# Altium PCB Alarm_Clock_PCB.PcbDoc
Units mm, origin at the board's own origin, x right, y up, seen from the top; angles counter-clockwise.
Board outline 152.4 x 101.6 mm, 2 copper layers (Top Layer, Bottom Layer); 50 components, 61 nets, 211 pads, 30 vias.
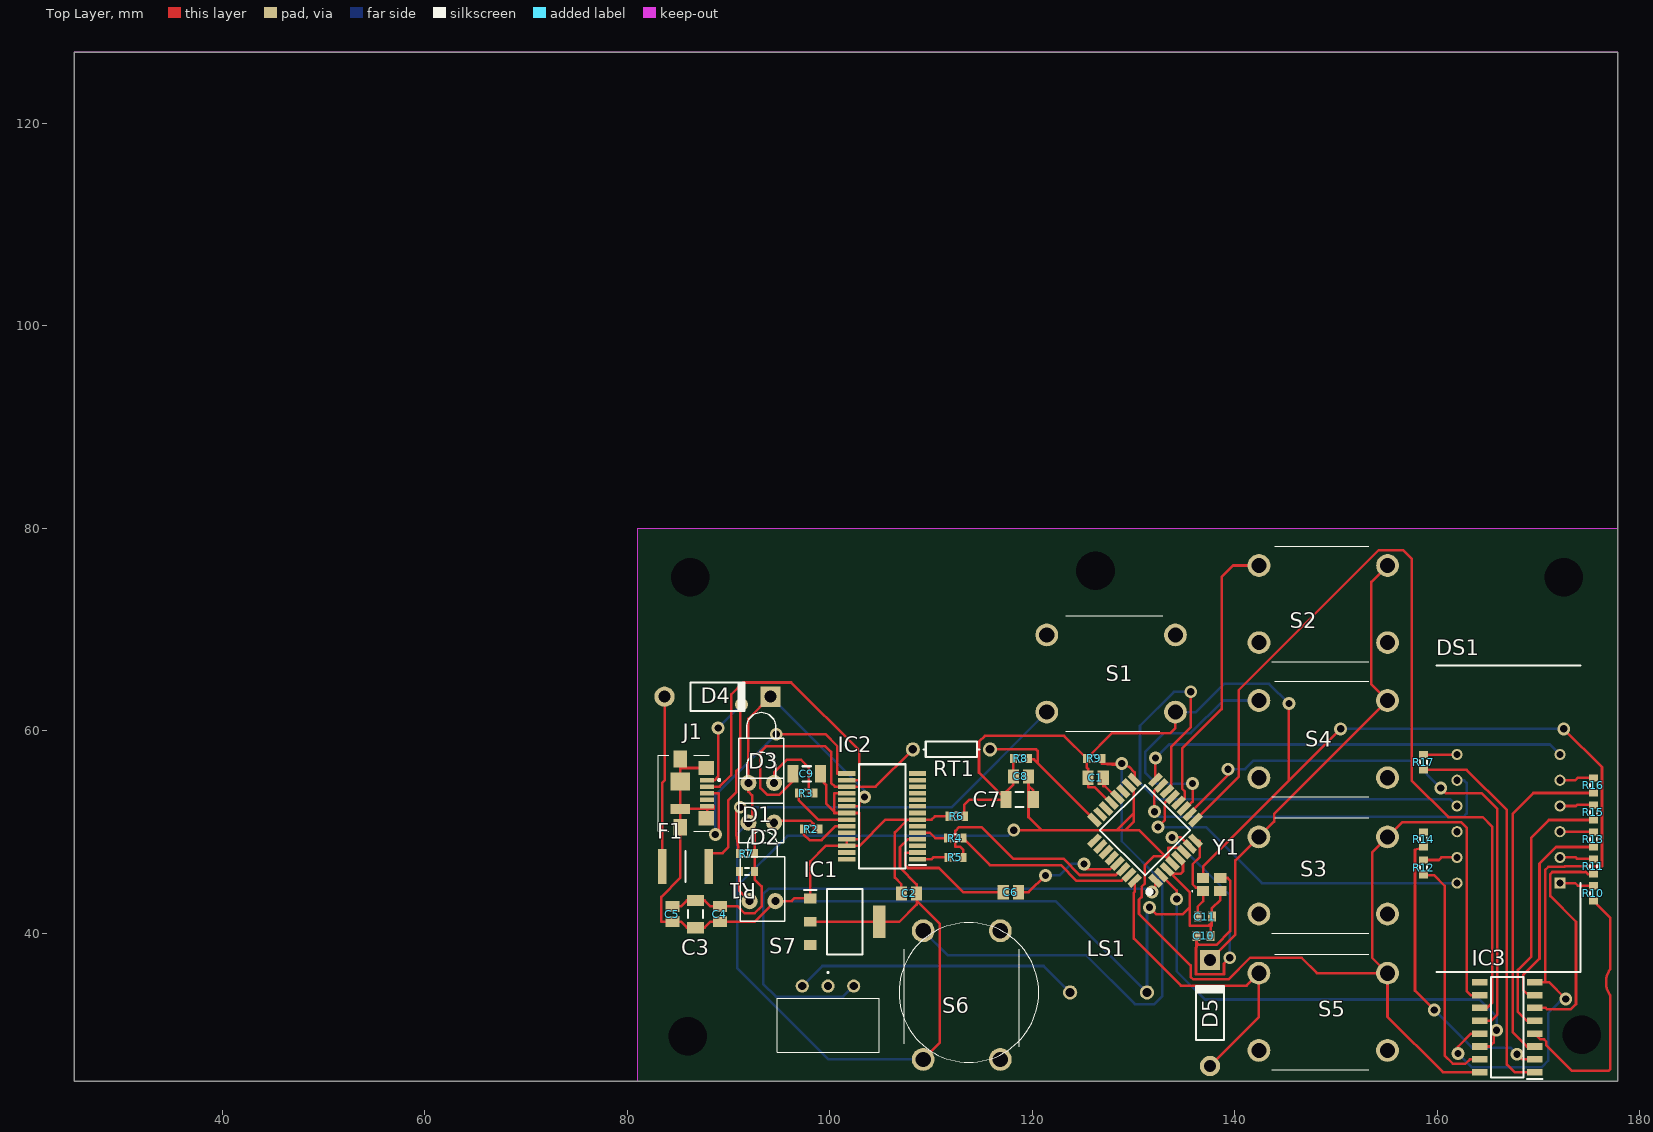
[diagram p0: Top Layer view]
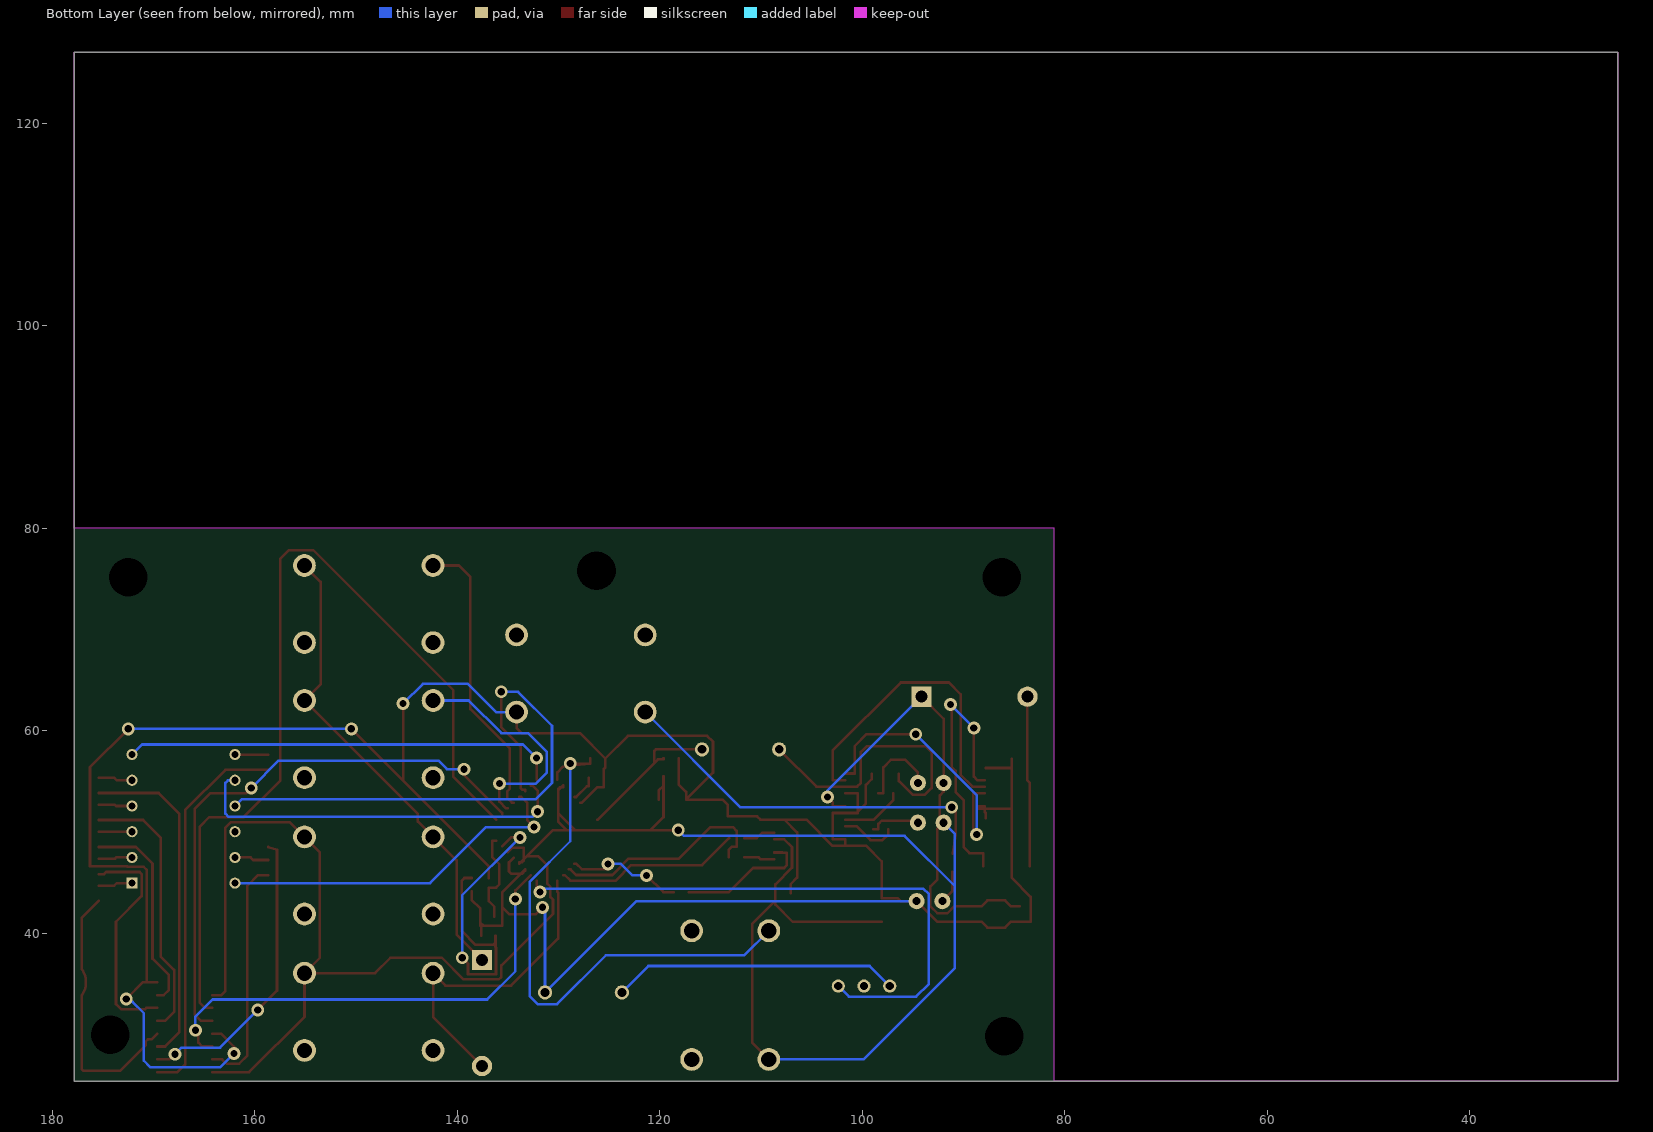
[diagram p1: Bottom Layer view, seen from below]

## Layer stack, top to bottom
Top Solder: solder mask 0.0102, Solder Resist, Dk 3.5
Top Layer: signal copper 0.0356
Dielectric 1: dielectric 0.32, FR-4, Dk 4.8
Bottom Layer: signal copper 0.0356
Bottom Solder: solder mask 0.0102, Solder Resist, Dk 3.5

## Board outline
25.4,25.4 177.8,25.4 177.8,127 25.4,127
cut-out: 25.4,127 25.4,93.726 25.4,42.164 25.4,25.4 81.059,25.4 81.059,80.01 177.8,80.01 177.8,115.189 177.8,127

## Design rules (kind name [scope] priority, off if disabled: settings)
Clearance [All] p1: gap=0.254 ignorepadtopadclearanceinfootprint=FALSE except(0: Arc-Hole Track-Hole SMDPad-Hole THPad-Hole Via-Hole Fill-Hole Poly-Hole Region-Hole Text-Hole)
PolygonConnect [All] p1: connectstyle=Relief reliefconductorwidth=0.254 reliefentries=4 polygonreliefangle="90 Angle" airgapwidth=0.254
RoomDefinition Alarm_Clock_Schematic [InComponentClass('Alarm_Clock_Schematic')] p1: confinementstyle=ConfineIn formatcopy=TRUE lockcomponents=FALSE outline 81.026,24.511 178.066,24.511 178.066,79.502 81.026,79.502
RoutingVias [All] p1: holewidth=0.711 width=1.27 viastyle="Through Hole" minholewidth=0.711 minwidth=1.27 maxholewidth=0.711 maxwidth=1.27
SolderMaskExpansion [All] p1: expansion=0.102 istentingtop=FALSE
Width [All] p1: maxlimit=0.254 minlimit=0.254 preferedwidth=0.254
30 further rules are at their usual default settings.

## Classes and differential pairs
component class Alarm_Clock_Schematic: C1 C2 C3 C4 C5 C6 C7 C8 C9 D1 D2 D3 D4 D5 DS1 F1 IC1 IC2 IC3 J1 LS1 R1 R2 R3 R4 R5 R6 R7 R8 R9 R10 R11 R12 R13 R14 R15 R16 R17 RT1 S2 S3 S4 S5 S6

## Components (designator, comment, footprint, x,y, rotation, side; value= is the part's Value field where it differs from the comment)
C1 "Cap" C0805 126.25,55.372 r0 top value=100nF
C2 "Cap" C0805 107.823,43.942 r0 top value=1uF
C3 "4.7uF _16V" C1206 86.741,41.91 r270 top
C4 "Cap" C0805 89.154,41.91 r90 top value=1uF
C5 "Cap" C0805 84.455,41.91 r90 top value=1uF
C6 "Cap" C0805 117.88,44.069 r180 top value=100nF
C7 "4.7uF _16V" C1206 118.745,53.213 r180 top
C8 "Cap" C0805 118.872,55.499 r0 top value=1uF
C9 "" C1206 97.722,55.753 r0 top value=100nF
C10 "22pF" CAPC1608X97N 136.906,39.751 r0 top
C11 "22pF" CAPC1608X97N 137.033,41.656 r0 top
D1 "PWR" LED-1 93.357,43.18 r90 top
D2 "RX" LED-1 93.23,50.927 r90 top
D3 "Tx" LED-1 93.23,54.864 r90 top
D4 "Diode 1N4001" DO-41 88.912,63.373 r0 top
D5 "Diode 1N4001" DO-41 137.541,32.131 r90 top
DS1 "E1-4036CUR1-CT" DIPS1016W51P254L3000H745Q12N 172.097,44.958 r180 top
F1 "MF-MSMF050-2" FUSC4632X85N 85.737,46.609 r0 top
IC1 "LM1117IMPX-5.0" SOT230P700X180-4N 101.473,41.148 r0 top
IC2 "FT232RL" SOP65P778X200-28N 105.168,51.562 r180 top
IC3 "74HC595D" SOIC127P600X175-16N 166.89,30.734 r180 top
J1 "0473461001" 0473461001 85.914,53.841 r270 top
LS1 "" 25415210ROX 123.728,34.163 r180 top
R1 "" J1-0603#1 91.833,46.101 r180 top value=1K
R2 "" J1-0603#1 98.171,50.292 r0 top value=1K
R3 "" J1-0603#1 97.675,53.848 r0 top value=1K
R4 "" J1-0603#1 112.395,49.403 r180 top value=1K
R5 "" J1-0603#1 112.407,47.498 r180 top value=1K
R6 "" J1-0603#1 112.534,51.562 r0 top value=1K
R7 "" J1-0603#1 91.821,47.879 r0 top value=10K
R8 "" J1-0603#1 118.872,57.277 r180 top value=10K
R9 "" J1-0603#1 126.123,57.277 r180 top value=10K
R10 "" J1-0603#1 175.399,43.954 r90 top value=220
R11 "" J1-0603#1 175.399,46.609 r90 top value=220
R12 "" J1-0603#1 158.635,46.494 r270 top value=220
R13 "" J1-0603#1 175.399,49.276 r90 top value=220
R14 "" J1-0603#2 158.635,49.276 r270 top value=220
R15 "" J1-0603#1 175.399,51.943 r90 top value=220
R16 "" J1-0603#1 175.399,54.61 r90 top value=220
R17 "" J1-0603#1 158.635,56.896 r270 top value=220
RT1 "ERT-J0EG103HA" AXIAL-0.3 112.014,58.166 r180 top
S1 "" 12411602 134.124,69.469 r180 top
S2 "H" 12411602 142.379,68.707 r0 top
S3 "T" 12411602 142.367,41.91 r0 top
S4 "M" 12411602 142.367,55.372 r0 top
S5 "A" 12411602 142.367,28.448 r0 top
S6 "TempSelect" 12411602 116.84,27.559 r90 top
S7 "09.10290.01" 091029001 99.822,34.798 r90 top
Y1 "ECS-160-8-36B2-CKM-TR" ECS160836B2CKMTR 137.707,44.816 r0 top
? "ATMEGA328P-AU" QFP80P900X900X120-32N 131.131,50.179 r135 top

## Footprints (in the part's own frame and the unit in brackets; to place one, negate y for a bottom-side part, rotate by r counter-clockwise, add the part's x,y. Pads: shape width x height; smd on the part's side, far side on the other; paste and mask are expansions set on the pad)
12411602 [mm]
  round 2.25 hole 1.5: 1(0,0) 2(12.7,0) 3(12.7,7.62) 4(0,7.62)
  silkscreen extent 1.25,-1.89 10.85,9.51, body extent -0.7,-1.9 13.3,9.5, height 4.65
25415210ROX [mm]
  round 1.417 hole 0.911: 1(0,0) 2(-7.59,0)
  silkscreen extent 3.1,-6.9 16.89,6.9, body extent -10.69,-6.9 3.1,6.9, height 8.61
091029001 [mm]
  round 1.3 hole 0.8: 1(0,0) 2(0,2.54) 3(0,-2.54)
  silkscreen extent -6.55,-5.08 1.4,5, body extent -8.6,-5 0.3,5, height 2.6
0473461001 [mm]
  rect 0.45x1.38 smd: 1(-1.3,1.975) 2(-0.65,1.975) 3(0,1.975) 4(0.65,1.975) 5(1.3,1.975)
  rect 1.425x1.55 smd: MP1(-2.487,1.89) MP2(2.487,1.89)
  rect 1.65x1.3 smd: MP3(-3.375,-0.685) MP6(3.375,-0.685)
  rect 1.8x1.9 smd: MP4(-1.15,-0.685)
  rect 1x1.9 smd: MP5(1.55,-0.685)
  silkscreen extent -3.75,-2.84 3.75,3.26, body extent -3.9,-2.5 3.9,2.5, height 2.72
AXIAL-0.3 [mm] "Axial Device, Thru-Hole; 2 Leads; 0.3 in Pin Spacing"
  round 1.4 hole 0.85: 1(-3.81,0) 2(3.81,0)
  silkscreen extent -2.77,-0.76 2.77,0.76
C0805 [mm] "Chip Capacitor, Body 2.0x1.3mm, IPC High Density"
  rect 1.1x1.4 smd: 1(-0.75,0) 2(0.75,0)
  body extent -1.1,-0.72 1.1,0.72, height 1.4
C1206 [mm] "Chip Capacitor, Body 3.2x1.6mm, IPC High Density"
  rect 1.1x1.7 smd: 1(-1.35,0) 2(1.35,0)
  silkscreen extent -0.4,-0.75 0.4,0.75, body extent -1.7,-0.9 1.7,0.9, height 1.3
CAPC1608X97N [mm]
  rect 0.78x0.98 smd: 1(-0.7,0) 2(0.7,0)
  body extent -0.8,-0.4 0.8,0.4, height 0.97
DIPS1016W51P254L3000H745Q12N [mm]
  rect 1.1x1.1 hole 0.7: 1(0,0)
  round 1.1 hole 0.7: 2(0,-2.54) 3(0,-5.08) 4(0,-7.62) 5(0,-10.16) 6(0,-12.7) 7(10.16,-12.7) 8(10.16,-10.16) 9(10.16,-7.62) 10(10.16,-5.08) 11(10.16,-2.54) 12(10.16,0)
  silkscreen extent -2.04,-21.47 12.21,8.77
DO-41 [mm] "Diode, Axial; Body 5.2 x 2.7 mm (LxDia. max), Lead Dia. 0.86 mm (max)"
  round 2 hole 1.2: 1(-5.23,0)
  rect 2x2 hole 1.2: 2(5.23,0)
  silkscreen extent -2.65,-1.4 2.75,1.4
ECS160836B2CKMTR [mm]
  rect 1.2x1 smd: 1(-0.85,-0.65) 2(0.85,-0.65) 3(0.85,0.65) 4(-0.85,0.65)
  silkscreen extent -1.95,-0.7 -1.85,-0.6, body extent -1.35,-1.05 1.35,1.05, height 0.7
FUSC4632X85N [mm]
  rect 0.85x3.43 smd: 1(-2.3,0) 2(2.3,0)
  silkscreen extent 0,-1.52 0,1.52, body extent -2.27,-1.62 2.27,1.62, height 0.85
J1-0603#1 [mm] "Chip Resistor, Body 1.6x0.8mm, IPC High Density"
  rect 0.7x0.9 smd: 1(-0.75,0) 2(0.75,0)
  silkscreen extent -0.2,-0.35 0.2,0.35, body extent -0.85,-0.48 0.85,0.48, height 0.9
J1-0603#2 [mm] "Chip Resistor, Body 1.6x0.8mm, IPC High Density"
  rect 0.7x0.9 smd: 2(0.75,0) 270(-0.75,0)
  silkscreen extent -0.2,-0.35 0.2,0.35, body extent -0.85,-0.48 0.85,0.48, height 0.9
LED-1 [mm] "LED; 2 Leads"
  round 1.6 hole 0.8: 1(0,1.27) 2(0,-1.27)
  silkscreen extent -2,-2.2 6.95,2.2
QFP80P900X900X120-32N [mm]
  rect 1.5x0.6 smd: 1(-4.25,2.8) 2(-4.25,2) 3(-4.25,1.2) 4(-4.25,0.4) 5(-4.25,-0.4) 6(-4.25,-1.2) 7(-4.25,-2) 8(-4.25,-2.8) 17(4.25,-2.8) 18(4.25,-2) 19(4.25,-1.2) 20(4.25,-0.4) 21(4.25,0.4) 22(4.25,1.2) 23(4.25,2) 24(4.25,2.8)
  rect 0.6x1.5 smd: 9(-2.8,-4.25) 10(-2,-4.25) 11(-1.2,-4.25) 12(-0.4,-4.25) 13(0.4,-4.25) 14(1.2,-4.25) 15(2,-4.25) 16(2.8,-4.25) 25(2.8,4.25) 26(2,4.25) 27(1.2,4.25) 28(0.4,4.25) 29(-0.4,4.25) 30(-1.2,4.25) 31(-2,4.25) 32(-2.8,4.25)
  silkscreen extent -4.8,-3.15 3.15,4.2, body extent -4.5,-4.5 4.5,4.5, height 1.2
SOIC127P600X175-16N [mm]
  rect 1.525x0.65 smd: 1(-2.712,4.445) 2(-2.712,3.175) 3(-2.712,1.905) 4(-2.712,0.635) 5(-2.712,-0.635) 6(-2.712,-1.905) 7(-2.712,-3.175) 8(-2.712,-4.445) 9(2.712,-4.445) 10(2.712,-3.175) 11(2.712,-1.905) 12(2.712,-0.635) 13(2.712,0.635) 14(2.712,1.905) 15(2.712,3.175) 16(2.712,4.445)
  silkscreen extent -3.48,-4.95 1.6,5.12, body extent -3.01,-4.94 3.01,4.96, height 1.75
SOP65P778X200-28N [mm]
  rect 1.7x0.45 smd: 1(-3.5,4.225) 2(-3.5,3.575) 3(-3.5,2.925) 4(-3.5,2.275) 5(-3.5,1.625) 6(-3.5,0.975) 7(-3.5,0.325) 8(-3.5,-0.325) 9(-3.5,-0.975) 10(-3.5,-1.625) 11(-3.5,-2.275) 12(-3.5,-2.925) 13(-3.5,-3.575) 14(-3.5,-4.225) 15(3.5,-4.225) 16(3.5,-3.575) 17(3.5,-2.925) 18(3.5,-2.275) 19(3.5,-1.625) 20(3.5,-0.975) 21(3.5,-0.325) 22(3.5,0.325) 23(3.5,0.975) 24(3.5,1.625) 25(3.5,2.275) 26(3.5,2.925) 27(3.5,3.575) 28(3.5,4.225)
  silkscreen extent -4.35,-5.14 2.3,5.14, body extent -3.89,-5.14 3.89,5.14, height 2
SOT230P700X180-4N [mm]
  rect 1.25x0.95 smd: 1(-3.4,2.3) 2(-3.4,0) 3(-3.4,-2.3)
  rect 1.25x3.2 smd: 4(3.4,0)
  silkscreen extent -4.02,-3.25 1.75,3.25, body extent -3.5,-3.25 3.5,3.25, height 1.8

## Part data
C1 C2 C4 C5 C6 C8: "Capacitor", LatestRevisionDate=17-Jul-2002, LatestRevisionNote="Re-released for DXP Platform.", PackageDescription="Radial Cap, Thru-Hole; 2 Leads; 0.3 in Pin Spacing", PackageReference=RAD-0.3, Published=8-Jun-2000, Publisher="Altium Limited"
C3 C7: library part "Cap Pol2", "Polarized Capacitor (Axial)", LatestRevisionDate=17-Jul-2002, LatestRevisionNote="Re-released for DXP Platform.", PackageDescription="Polarized Capacitor; 2 Leads", PackageReference=POLAR0.8, Published=8-Jun-2000, Publisher="Altium Limited"
C9: library part "Cap Semi", "Capacitor (Semiconductor SIM Model)", LatestRevisionDate=29-May-2009, LatestRevisionNote="IPC-7351 Footprint Added.", PackageDescription="Chip Capacitor", PackageReference=C1206, Published=8-Jun-2000, Publisher="Altium Limited"
C10 C11: library part VJ0603A220JXBAC, "Capacitor", Manufacturer_Name=Vishay, Mouser Part Number=77-VJ0603A220JXBAC, Datasheet Link=http://www.vishay.com/docs/45226/vj31xrohsautomlcc.pdf, Height=0.97mm, Manufacturer_Part_Number=VJ0603A220JXBAC, Mouser Price/Stock=https://www.mouser.co.uk/ProductDetail/Vishay-Vitramon/VJ0603A220JXBAC/?qs=cPJiB9SLnv4cPK1%252B20z21w%3D%3D
D1: library part LED1, "Typical Blue GaAs LED", LatestRevisionDate=08-Jul-2005, LatestRevisionNote="Mech Layer 1 removed.", PackageDescription="LED; 2 Leads", PackageReference=LED-1, Published=8-Jun-2000, Publisher="Altium Limited"
D2: library part LED1, "Typical RED GaAs LED", LatestRevisionDate=08-Jul-2005, LatestRevisionNote="Mech Layer 1 removed.", PackageDescription="LED; 2 Leads", PackageReference=LED-1, Published=8-Jun-2000, Publisher="Altium Limited"
D3: library part LED1, "Typical Green GaAs LED", LatestRevisionDate=08-Jul-2005, LatestRevisionNote="Mech Layer 1 removed.", PackageDescription="LED; 2 Leads", PackageReference=LED-1, Published=8-Jun-2000, Publisher="Altium Limited"
D4 D5: "1 Amp General Purpose Rectifier", Code_JEDEC=DO-204-AL, ComponentLink1Description="Manufacturer Link", ComponentLink1URL=http://www.fairchildsemi.com/, ComponentLink2Description=Datasheet, ComponentLink2URL=http://www.fairchildsemi.com/ds/1N%2F1N4001.pdf, DatasheetVersion=1998, LatestRevisionDate=17-Jul-2002, LatestRevisionNote="Re-released for DXP Platform.", PackageDescription="Diode, Axial; Body 5.2 x 2.7 mm (LxDia. max), Lead Dia. 0.86 mm (max)", PackageReference=DO-41, PackageVersion=Aug-1999, Published=8-Jun-2000, Publisher="Altium Limited"
DS1: "Display", Manufacturer_Name="STRONG BASED", Datasheet Link=https://cdn.ozdisan.com/ETicaret_Dosya/383272_1248365.pdf, Height=7.45mm, Manufacturer_Part_Number=E1-4036CUR1-CT
F1: "Fuse", Manufacturer_Name=Bourns, Mouser Part Number=652-MF-MSMF050-2, Arrow Part Number=MF-MSMF050-2, Arrow Price/Stock=https://www.arrow.com/en/products/mf-msmf050-2/bourns?region=nac, Datasheet Link=https://www.bourns.com/pdfs/mfmsmf.pdf, Height=0.85mm, Manufacturer_Part_Number=MF-MSMF050-2, Mouser Price/Stock=https://www.mouser.co.uk/ProductDetail/Bourns/MF-MSMF050-2?qs=t3shhpq1i1DZ7OBD5kLNoA%3D%3D
IC1: "Integrated Circuit", Manufacturer_Name="Texas Instruments", Mouser Part Number=926-LM1117IMPX-50, Datasheet Link=https://www.ti.com.cn/cn/lit/ds/symlink/lm1117.pdf?ts=1616831265067&ref_url=https%253A%252F%252Fwww.ti.com.cn%252Fproduct%252Fcn%252FLM1117, Height=1.8mm, Manufacturer_Part_Number=LM1117IMPX-5.0, Mouser Price/Stock=https://www.mouser.co.uk/ProductDetail/Texas-Instruments/LM1117IMPX-50?qs=X1J7HmVL2ZEsJC9W8GAV9A%3D%3D
IC2: "Integrated Circuit", Manufacturer_Name="FTDI Chip", Arrow Part Number=FT232RL, Arrow Price/Stock=https://www.arrow.com/en/products/ft232rl/ftdi-chip, Datasheet Link=http://www.ftdichip.com/Support/Documents/DataSheets/ICs/DS_FT232R.pdf, Height=2mm, Manufacturer_Part_Number=FT232RL
IC3: "Integrated Circuit", Manufacturer_Name=Toshiba, Mouser Part Number=N/A, Arrow Part Number=74HC595D, Arrow Price/Stock=https://www.arrow.com/en/products/74hc595d/toshiba?region=nac, Datasheet Link=https://toshiba.semicon-storage.com/info/docget.jsp?did=36768&prodName=74HC595D, Height=1.75mm, Manufacturer_Part_Number=74HC595D, Mouser Price/Stock=https://www.mouser.co.uk/ProductDetail/Toshiba/74HC595D?qs=7EBvPakHacViJoQmXKcnew%3D%3D
J1: "Connector", Manufacturer_Name=Molex, Mouser Part Number=N/A, Arrow Part Number=0473461001, Arrow Price/Stock=https://www.arrow.com/en/products/0473461001/molex?region=nac, Datasheet Link=https://componentsearchengine.com/Datasheets/1/0473461001.pdf, Height=2.45mm, Manufacturer_Part_Number=0473461001, Mouser Price/Stock=https://www.mouser.com/Search/Refine.aspx?Keyword=N%2FA
LS1: library part 254-15210-ROX, "Loudspeaker or Buzzer", Manufacturer_Name=Kobitone, Datasheet Link=https://www.mouser.de/datasheet/2/209/KT-400269-1172018.pdf, Height=8.51mm, Manufacturer_Part_Number=254-15210-ROX, Mouser Part Number=254-15210-ROX, Mouser Price/Stock=https://www.mouser.co.uk/ProductDetail/Kobitone/254-15210-ROX?qs=05UEgX2TgG1gFl%2FaATOCEw%3D%3D
R1 R2 R3 R4 R5 R6 R7 R8 R9 R10 R11 R12 R13 R14 R15 R16 R17: library part Res3, "Resistor", LatestRevisionDate=29-May-2009, LatestRevisionNote="IPC-7351 Footprint Added.", PackageDescription="Chip Resistor", PackageReference=J1-0603, Published=8-Jun-2000, Publisher="Altium Limited"
RT1: "Thermistor", Manufacturer_Name=Panasonic, Mouser Part Number=667-ERT-J0EG103HA, Arrow Part Number=ERT-J0EG103HA, Arrow Price/Stock=https://www.arrow.com/en/products/ert-j0eg103ha/panasonic, Datasheet Link=https://datasheet.datasheetarchive.com/originals/distributors/Datasheets-DGA6/548517.pdf, Height=0.55mm, Manufacturer_Part_Number=ERT-J0EG103HA, Mouser Price/Stock=https://www.mouser.com/Search/Refine.aspx?Keyword=667-ERT-J0EG103HA
S1 S2 S3 S4 S5 S6: library part 1241.1602, "Switch", Manufacturer_Name=SCHURTER, Mouser Part Number=693-1241.1602, Datasheet Link=https://www.schurter.com/en/datasheet/PMS, Height=4.55mm, Manufacturer_Part_Number=1241.1602, Mouser Price/Stock=https://www.mouser.co.uk/ProductDetail/Schurter/12411602?qs=JHn%2F0Af%2Fl5EgRnV0HUH1SQ%3D%3D
S7: "Switch", Manufacturer_Name=EOZ, Datasheet Link=http://uk.rs-online.com/web/p/products/2047871, Height=2.5mm, Manufacturer_Part_Number=09.10290.01
Y1: "Crystal or Oscillator", Manufacturer_Name=ECS, Mouser Part Number=520-160-8-36B2-CKMTR, Datasheet Link=https://www.mouser.fr/datasheet/2/122/ECX_2236B2-2400583.pdf, Height=0.6mm, Manufacturer_Part_Number=ECS-160-8-36B2-CKM-TR, Mouser Price/Stock=https://www.mouser.co.uk/ProductDetail/ECS/ECS-160-8-36B2-CKM-TR?qs=QNEnbhJQKvaIQPndV3OLHg%3D%3D
?: "Integrated Circuit", Manufacturer_Name=Microchip, Mouser Part Number=556-ATMEGA328P-AU, Arrow Part Number=ATMEGA328P-AU, Arrow Price/Stock=https://www.arrow.com/en/products/atmega328p-au/microchip-technology?region=nac, Datasheet Link=https://componentsearchengine.com/Datasheets/2/ATMEGA328P-AU.pdf, Height=1.2mm, Manufacturer_Part_Number=ATMEGA328P-AU, Mouser Price/Stock=https://www.mouser.co.uk/ProductDetail/Microchip-Technology-Atmel/ATMEGA328P-AU?qs=K8BHR703ZXiCmmgp6%2FGNmQ%3D%3D

## Free pads (board coordinates)
  round 1.524 hole 3.81: Mount1(85.979,29.845) Mount1(86.233,75.184) Mount1(126.238,75.819) Mount1(172.466,75.184) Mount1(174.244,29.972)

## Via types
v1: diameter 1.27, hole 0.711, Top Layer to Bottom Layer, 30 vias

## Nets (pads, with @x,y where several pads share a name; then routed paths per layer and width w, separated by ;. In a path a pad name is that pad's centre, name@x,y a point inside that pad or via, vN(x,y) a via of type N, cw(c..) or ccw(c..) an arc to the next point about the centre after c; other vN are vias at no path point)
3v3: C9.1 IC2.17 RT1.2 | length 28.6
  Top Layer w0.254: C9.1 96.372,55.042 95,53.67 93.828,53.67 93.142,54.356 93.142,57.912 93.701,58.471 99.568,58.471 100.127,57.912 100.127,54.864 100.504,54.487 IC2.17 104.525,54.487 RT1.2
A0: ?.23
A1: ?.24 R8.1 RT1.1 | length 15
  Top Layer w0.254: RT1.1 120.374,58.166 120.523,58.017 120.523,56.828 ; R8.1 119.622,57.175 120.175,57.175 120.523,56.828 ; ?.24 120.523,56.828
A2: ?.25
A3: ?.26
"A4 (SDA)": ?.27
"A5 (SCL)": ?.28
A6: ?.19
A7: ?.22
D0/RX: ?.30 R5.1 | length 22.1
  Top Layer w0.254: R5.1 113.157,48.26 112.852,48.565 112.395,48.565 112.395,50.114 112.776,50.495 114.986,50.495 118.11,47.371 123.063,47.371 124.667,45.767 128.249,45.767 128.806,46.325 ?.30
D1/TX: ?.31 R4.1 | length 18.4
  Top Layer w0.254: R4.1 115.812,46.736 122.809,46.736 124.333,45.212 128.488,45.212 128.499,45.202 128.814,45.202 129.372,45.76 ?.31
D2: ?.32 D5.1 S5.4 | length 31.7
  Top Layer w0.254: ?.32 130.106,44.094 130.023,44.011 130.023,39.49 134.663,34.849 141.148,34.849 S5.4 142.367,31.727 D5.1
D3: ?.1 S7.3 | length 58.7
  Top Layer w0.254: v1(131.801,44.094) 132.157,44.45 ?.1
  Bottom Layer w0.254: S7.3 101.321,33.757 94.666,33.757 93.421,35.001 93.421,43.866 93.98,44.425 131.47,44.425 v1(131.801,44.094)
D4: ?.2 IC3.14 | length 47.8
  Top Layer w0.254: ?.2 134.252,44.23 v1(134.252,43.396) ; IC3.14 165.176,28.829 165.557,29.21 165.557,30.15 v1(165.837,30.429)
  Bottom Layer w0.254: v1(134.252,43.396) 134.252,36.258 137.038,33.472 164.14,33.472 165.837,31.775 v1(165.837,30.429)
D5: ?.9 IC3.11 | length 88.3
  Top Layer w0.254: ?.9 140.36,55.448 140.36,64.008 154.203,77.851 156.591,77.851 157.48,76.962 157.48,55.067 161.07,51.477 164.474,51.477 165.405,50.546 165.405,33.147 164.897,32.639 IC3.11
D6: ?.10 IC3.12 | length 57.2
  Top Layer w0.254: ?.10 135.551,51.883 139.319,55.651 v1(139.319,56.21) ; v1(160.325,54.356) 160.833,53.848 164.363,53.848 165.913,52.299 165.913,31.979 165.303,31.369 IC3.12
  Bottom Layer w0.254: v1(139.319,56.21) 140.995,56.21 141.834,57.048 157.632,57.048 v1(160.325,54.356)
D7: ?.11 S4.4 | length 23.4
  Top Layer w0.254: ?.11 135.153,52.336 135.825,53.008 v1(135.825,54.788)
  Bottom Layer w0.254: v1(135.825,54.788) 132.232,54.788 131.14,55.88 131.14,57.912 132.994,59.766 135.636,59.766 138.862,62.992 S4.4
D8: ?.12 S2.4 | length 28.5
  Top Layer w0.254: ?.12 134.588,52.901 135.064,53.378 135.064,54.013 134.798,54.28 134.798,58.268 138.684,62.154 138.684,75.184 139.827,76.327 S2.4
D9: ?.13 DS1.12 | length 35.5
  Top Layer w0.254: v1(132.41,50.495) 133.071,51.156 133.071,52.852 133.685,53.467 ?.13
  Bottom Layer w0.254: v1(132.41,50.495) 137.135,50.495 142.672,44.958 DS1.12
D10: ?.14 DS1.9 | length 55.2
  Top Layer w0.254: ?.14 133.288,54.178 133.553,54.178 133.731,54.356 133.731,58.445 135.636,60.35 v1(135.636,63.856)
  Bottom Layer w0.254: v1(135.636,63.856) 133.985,63.856 130.632,60.503 130.632,54.864 132.232,53.264 161.251,53.264 DS1.9
D11: ?.15 DS1.8 | length 38.2
  Top Layer w0.254: v1(132.055,52.019) 132.055,54.099 132.554,54.598 ?.15
  Bottom Layer w0.254: v1(132.055,52.019) 132.563,51.511 162.585,51.511 162.89,51.816 162.89,54.864 162.636,55.118 DS1.8
D12: ?.16 DS1.6 | length 43
  Top Layer w0.254: ?.16 v1(132.157,57.302)
  Bottom Layer w0.254: v1(132.157,57.302) 133.503,58.649 171.106,58.649 DS1.6
D13: ?.17 R9.1 S6.3 | length 58.2
  Top Layer w0.254: R9.1 126.873,56.769 ; v1(128.829,56.769) 126.873,56.769 ; ?.17 130.106,55.898 129.54,56.464 128.804,56.548 126.873,56.769
  Bottom Layer w0.254: S6.3 111.658,37.821 125.324,37.821 130.124,33.02 132.055,33.02 132.817,33.782 132.817,45.11 128.829,49.098 v1(128.829,56.769)
GND: ?.3 ?.5 ?.21 C1.1 C2.1 C3.2 C4.1 C5.1 C7.2 C8.1 C9.2 C10.2 C11.2 D1.2 IC1.1 IC2.7 IC2.18 IC2.21 IC2.25 IC2.26 IC3.8 IC3.13 J1.5 J1.MP1 J1.MP2 J1.MP3 J1.MP4 J1.MP5 J1.MP6 LS1.2 R6.1 R6.2 R8.2 R9.2 S1.4 Y1.2 Y1.4 | length 320
  Top Layer w0.254: J1.MP3 85.229,56.328 ; J1.MP2 87.804,51.892 87.889,51.977 87.889,52.291 ; J1.MP1 85.229,56.328 ; IC1.1 IC1.1@98.069,43.448 ; C9.2 99.072,55.22 99.644,54.647 99.644,52.827 100.432,52.039 ; IC2.18 100.432,53.837 100.432,52.039 ; C2.1 107.073,44.85 106.421,45.502 106.421,49.962 107.696,51.237 ; R8.2 C8.1 118.122,54.702 117.395,53.975 C7.2 ; ?.21 127.675,52.901 126.144,54.432 125.5,54.432 C1.1 125.5,56.236 125.373,56.363 R9.2 ; v1(131.572,42.57) 132.258,41.885 134.823,41.885 135.56,42.621 ; S1.4 134.124,60.261 133.604,59.741 127.837,59.741 R9.2 ; ?.5 134.874,47.002 134.874,46.126 134.62,45.872 ?.3@133.741,45.872 ; Y1.4 136.857,46.609 145.339,55.091 ; C10.2 137.606,40.64 137.733,40.767 137.733,41.086 ; Y1.2 138.557,43.318 137.733,42.494 C11.2 137.733,41.086 ; v1(145.339,62.687) 145.339,55.091 ; v1(150.446,60.198) 145.339,55.091 ; v1(162.027,28.143) 162.027,28.804 163.322,30.099 IC3.13 ; IC3.8 170.637,35.179 ; v1(172.466,60.198) 176.251,56.413 176.251,46.609 172.593,46.609 172.551,46.567 170.942,46.567 170.637,46.262 170.637,35.179 ; v1(172.669,33.528) 171.018,35.179 170.637,35.179 ; J1.MP5 87.889,52.291 ; J1.MP5 J1.MP6 85.229,45.478 83.363,43.612 83.363,41.16 C5.1 85.293,41.16 85.893,40.56 C3.2 87.63,40.56 88.23,41.16 C4.1 92.607,41.16 D1.2 96.215,43.18 96.483,43.448 IC1.1@98.069,43.448 ; J1.MP5 J1.MP4 85.229,56.328 ; 87.889,52.291 J1.5 88.541,52.541 88.541,52.291 87.889,52.291 ; IC1.1@98.069,43.448 98.069,47.113 99.593,48.637 IC2.26 ; 100.432,52.039 100.584,51.887 ; 100.432,52.039 100.432,51.887 100.584,51.887 ; 100.584,51.887 IC2.21 102.921,51.887 102.921,49.287 IC2.25 IC2.26 ; IC2.26 102.921,48.637 105.521,51.237 107.696,51.237 ; 107.696,51.237 IC2.7 110.058,51.237 110.383,51.562 R6.1 R6.2 113.284,52.705 113.792,53.213 C7.2 ; C7.2 114.732,55.876 114.732,58.928 115.316,59.512 123.138,59.512 R9.2 ; ?.3@133.741,45.872 133.604,45.872 133.288,46.188 ?.3 ?.3@133.741,45.872 ; ?.3@133.741,45.872 135.56,44.053 135.56,42.621 ; 135.56,42.621 135.56,40.767 137.414,40.767 137.733,41.086
  Bottom Layer w0.254: D1.2 122.301,43.18 LS1.2 131.318,42.316 v1(131.572,42.57) ; S1.4 136.144,61.849 138.938,64.643 143.383,64.643 v1(145.339,62.687) ; v1(150.446,60.198) v1(172.466,60.198) ; v1(162.027,28.143) 163.373,26.797 170.307,26.797 170.942,27.432 170.942,32.131 172.04,33.229 172.095,33.229 172.394,33.528 v1(172.669,33.528)
Net_7: ?.7 C10.1 Y1.3 | length 34.9
  Top Layer w0.254: v1(133.782,49.479) 134.66,49.479 ?.7 ; C10.1 136.206,39.116 ; Y1.3 139.284,45.466 139.538,45.212 139.538,40.224 138.176,38.862 136.46,38.862 136.206,39.116 ; v1(139.497,37.592) 138.922,37.017 138.922,35.98 136.16,35.98 136.16,38.608 136.206,38.654 136.206,39.116
  Bottom Layer w0.254: v1(133.782,49.479) 139.497,43.764 v1(139.497,37.592)
Net_8: ?.8 C11.1 Y1.1 | length 9.3
  Top Layer w0.254: ?.8 136.55,49.154 136.55,47.549 135.839,46.838 135.839,44.831 136.144,44.526 136.857,44.526 Y1.1 136.857,43.171 136.333,42.647 C11.1
Net_20: ?.20 C1.2 | length 2.7
  Top Layer w0.254: C1.2 127,54.508 127.199,54.508 128.241,53.467 ?.20
NetC6_2: C6.2 IC2.2 | length 13.3
  Top Layer w0.254: IC2.2 107.874,47.987 107.83,47.943 107.437,47.943 107.437,46.736 107.716,46.457 110.769,46.457 113.157,44.069 C6.2
NetD1_1: D1.1 R1.2 | length 3.3
  Top Layer w0.254: R1.2 91.083,44.184 D1.1
NetD2_2: D2.2 R2.2 | length 5.1
  Top Layer w0.254: D2.2 94.703,51.13 98.069,51.13 98.4,50.8 98.4,50.292 R2.2
NetD3_2: D3.2 R3.2 | length 8.3
  Top Layer w0.254: D3.2 94.5,55.88 95.745,57.125 97.18,57.125 97.917,56.388 97.917,53.848 R3.2
NetD5_2: D5.2 S2.3 S3.4 S4.3 | length 47.6
  Top Layer w0.254: D5.2 140.054,39.874 140.054,47.217 S3.4 143.866,51.029 143.866,51.791 S4.3 153.467,64.592 153.467,74.715 S2.3
NetDS1_1: DS1.1 R10.2 | length 3.4
  Top Layer w0.254: DS1.1 173.609,44.958 173.863,44.704 R10.2
NetDS1_2: DS1.2 R11.2 | length 3.4
  Top Layer w0.254: DS1.2 173.66,47.498 173.799,47.359 R11.2
NetDS1_3: DS1.3 R13.2 | length 3.3
  Top Layer w0.254: DS1.3 173.736,50.038 173.748,50.026 R13.2
NetDS1_4: DS1.4 R15.2 | length 3.3
  Top Layer w0.254: DS1.4 173.685,52.578 173.8,52.693 R15.2
NetDS1_5: DS1.5 R16.2 | length 3.4
  Top Layer w0.254: DS1.5 173.609,55.118 173.851,55.36 R16.2
NetDS1_7: DS1.7 R17.1 | length 3.3
  Top Layer w0.254: R17.1 160.274,57.646 160.286,57.658 DS1.7
NetDS1_10: DS1.10
NetDS1_11: DS1.11 R12.1 | length 3.4
  Top Layer w0.254: R12.1 160.147,47.244 160.401,47.498 DS1.11
NetF1_2: F1.2 J1.1 | length 27.5
  Top Layer w0.254: J1.1 88.646,55.141 88.976,55.471 v1(88.976,60.274) ; F1.2 88.037,47.93 89.408,47.93 89.992,48.514 89.992,53.162 90.779,53.949 90.779,56.032 91.161,56.414 91.161,62.586 v1(91.288,62.586)
  Bottom Layer w0.254: v1(88.976,60.274) v1(91.288,62.586)
NetIC2_15: IC2.15 J1.3 | length 27.9
  Top Layer w0.254: J1.3 89.052,53.841 89.052,50.114 v1(88.697,49.759) ; v1(94.717,59.665) 99.568,59.665 100.736,58.496 100.736,55.787 IC2.15
  Bottom Layer w0.254: v1(88.697,49.759) 88.697,53.645 v1(94.717,59.665)
NetIC2_16: IC2.16 J1.2 | length 30.9
  Top Layer w0.254: J1.2 89.129,54.491 90.271,55.633 90.271,63.601 91.44,64.77 96.19,64.77 102.921,58.039 102.921,55.137 IC2.16
NetIC2_22: IC2.22 R3.1 | length 6.2
  Top Layer w0.254: R3.1 96.925,53.169 98.857,51.237 IC2.22
NetIC2_23: IC2.23 R2.1 | length 5.6
  Top Layer w0.254: R2.1 97.421,49.784 98.005,49.2 99.197,49.2 100.584,50.587 IC2.23
NetLS1_1: LS1.1 S7.2 | length 28.4
  Bottom Layer w0.254: S7.2 99.263,36.779 121.112,36.779 LS1.1
NetR7_1: R7.1 S1.3 | length 38.9
  Top Layer w0.254: R7.1 90.779,49.759 90.779,52.069 v1(91.161,52.451)
  Bottom Layer w0.254: v1(91.161,52.451) 112.026,52.451 S1.3
QA: IC3.15 R12.2 | length 23.3
  Top Layer w0.254: R12.2 159.666,45.744 160.706,44.704 160.706,27.94 161.519,27.127 162.763,27.127 163.195,27.559 IC3.15
QB: IC3.1 R17.2 | length 38.1
  Top Layer w0.254: R17.2 162.89,56.146 166.853,52.184 166.853,27.051 167.615,26.289 IC3.1
QC: IC3.2 R14.2 | length 29.4
  Top Layer w0.254: R14.2 157.785,48.26 157.785,34.341 v1(159.69,32.436) ; v1(167.869,28.067) 168.377,27.559 IC3.2
  Bottom Layer w0.254: v1(159.69,32.436) 163.398,28.727 167.208,28.727 v1(167.869,28.067)
QD: IC3.3 R16.1 | length 33.1
  Top Layer w0.254: IC3.3 168.834,28.829 167.442,30.22 167.442,51.822 169.481,53.86 R16.1
QE: IC3.4 R10.1 | length 26.7
  Top Layer w0.254: IC3.4 170.092,29.609 170.166,29.535 170.522,29.535 170.745,29.312 170.745,28.955 170.82,28.881 173.204,26.497 173.279,26.422 176.896,26.422 177.044,26.571 177.044,33.906 cw(c178.943,35.179) 177.044,36.452 177.044,41.559 176.97,41.633 R10.1
QF: IC3.5 R15.1 | length 26.6
  Top Layer w0.254: IC3.5 168.839,31.369 167.95,32.258 167.95,36.398 169.266,37.713 169.266,49.454 171.005,51.193 R15.1
QG: IC3.6 R11.1 | length 22.6
  Top Layer w0.254: IC3.6 170.688,32.639 170.815,32.512 173.177,32.512 173.685,33.02 173.685,41.148 171.145,43.688 171.145,45.847 171.357,46.059 174.667,46.059 174.867,45.859 R11.1
QH: IC3.7 R13.1 | length 20.5
  Top Layer w0.254: IC3.7 168.966,33.909 168.458,34.417 168.458,35.89 170.078,37.51 170.078,46.9 171.704,48.526 R13.1
Reset: ?.29 C6.1 | length 10.9
  Top Layer w0.254: C6.1 119.634,44.069 v1(121.285,45.72) ; v1@125.095,46.355 125.117,46.333 127.683,46.333 128.241,46.891 ?.29
  Bottom Layer w0.254: v1@121.539,45.72 122.682,45.72 123.825,46.863 v1(125.095,46.863)
RX: IC2.1 R5.2 | length 3.1
  Top Layer w0.254: IC2.1 110.058,47.337 110.219,47.498 R5.2
TX: IC2.5 R4.2 | length 3.2
  Top Layer w0.254: IC2.5 109.88,49.937 110.414,49.403 R4.2
VCC: ?.4 ?.6 ?.18 C2.2 C3.1 C4.2 C5.2 C7.1 C8.2 D2.1 D3.1 D4.2 IC1.2 IC1.4 IC2.4 IC2.20 IC3.10 IC3.16 R1.1 R7.2 S3.3 S5.3 S6.4 | length 281.5
  Top Layer w0.254: C5.2 85.293,42.66 85.893,43.26 C3.1 87.63,43.26 88.23,42.66 C4.2 90.919,42.66 91.592,41.986 92.583,41.986 93.269,42.672 93.269,44.628 92.583,45.314 R1.1 92.583,46.965 92.571,46.977 R7.2 92.571,50.316 D2.1 92.329,51.296 92.329,53.632 91.96,54.001 D3.1 91.96,61.191 D4.2 ; IC1.2 IC1.4 106.871,41.148 108.573,42.85 108.573,43.231 ; IC2.20 102.921,52.537 102.921,52.959 v1(103.429,53.467) ; IC2.4 107.696,49.287 106.929,48.52 106.929,46.482 108.573,44.838 C2.2 108.573,43.231 ; S6.4 110.846,29.185 110.846,40.958 108.573,43.231 ; v1(118.161,50.19) 120.904,50.19 ; C8.2 119.622,54.575 ; C7.1 120.095,54.102 119.622,54.575 ; ?.6 134.544,48.463 133.401,48.463 ?.4@133.401,47.344 ; IC3.16 160.528,26.289 155.067,31.75 S5.3 ; IC3.10 163.271,33.909 162.89,34.29 162.89,50.444 162.366,50.969 156.506,50.969 S3.3 153.543,48.006 153.543,37.592 S5.3 ; 119.622,54.575 119.622,53.213 119.622,51.472 120.904,50.19 ; 120.904,50.19 128.372,50.19 ; 128.372,50.19 129.184,50.19 ; 128.372,50.19 129.997,51.816 ; 129.184,50.19 130.554,50.19 133.12,47.625 ; 129.184,50.19 129.997,51.003 129.997,51.816 ; ?.18@129.707,54.432 ?.18@129.997,54.142 ; ?.18@129.707,54.432 ?.18 129.54,54.432 ?.18@129.707,54.432 ; ?.18@129.707,54.432 129.845,54.432 129.997,54.28 ?.18@129.997,54.142 ; 129.997,51.816 ?.18@129.997,54.142 ; 133.12,47.625 ?.4@133.401,47.344 ; 133.12,47.625 132.004,47.625 131.115,46.736 131.115,44.933 130.785,44.602 130.785,43.586 130.531,43.332 130.531,41.935 135.636,36.83 135.636,35.712 135.89,35.458 139.37,35.458 141.503,37.592 146.583,37.592 148.107,36.068 S5.3 ; ?.4@133.401,47.344 133.401,47.219 133.579,47.041 ?.4@133.704,47.041 ; ?.4@133.401,47.344 ?.4@133.704,47.041 ; ?.4@133.704,47.041 133.854,47.041 ?.4 ?.4@133.704,47.041
  Bottom Layer w0.254: D2.1 90.881,49.848 90.881,44.704 ; D4.2 103.429,54.086 v1(103.429,53.467) ; S6.4 99.873,27.559 90.881,36.551 90.881,44.704 ; v1(118.161,50.19) 117.602,49.632 95.809,49.632 90.881,44.704
VIN: IC1.3
VUSB: D4.1 F1.1 | length 16.9
  Top Layer w0.254: F1.1 83.437,54.864 83.682,55.109 D4.1
pads on no net: IC2.3 IC2.6 IC2.8 IC2.9 IC2.10 IC2.11 IC2.12 IC2.13 IC2.14 IC2.19 IC2.24 IC2.27 IC2.28 IC3.9 J1.4 R14.270 S1.1 S1.2 S2.1 S2.2 S3.1 S3.2 S4.1 S4.2 S5.1 S5.2 S6.1 S6.2 S7.1

## Other copper
Multi-Layer:
  text "Alarm Clock" at 89.281,71.882 h2.54
  text "with Temp" at 94.742,68.283 h2.54
  text "Nathan Drzadinski" at 93.853,65.405 h1.52